# Altium PCB STM32C011F6U.PcbDoc
Units mil, origin at the board's own origin, x right, y up, seen from the top; angles counter-clockwise.
Board outline 3543.31 x 1377.95 mil, 2 copper layers (Top Layer, Bottom Layer); 14 components, 19 nets, 72 pads, 60 vias.
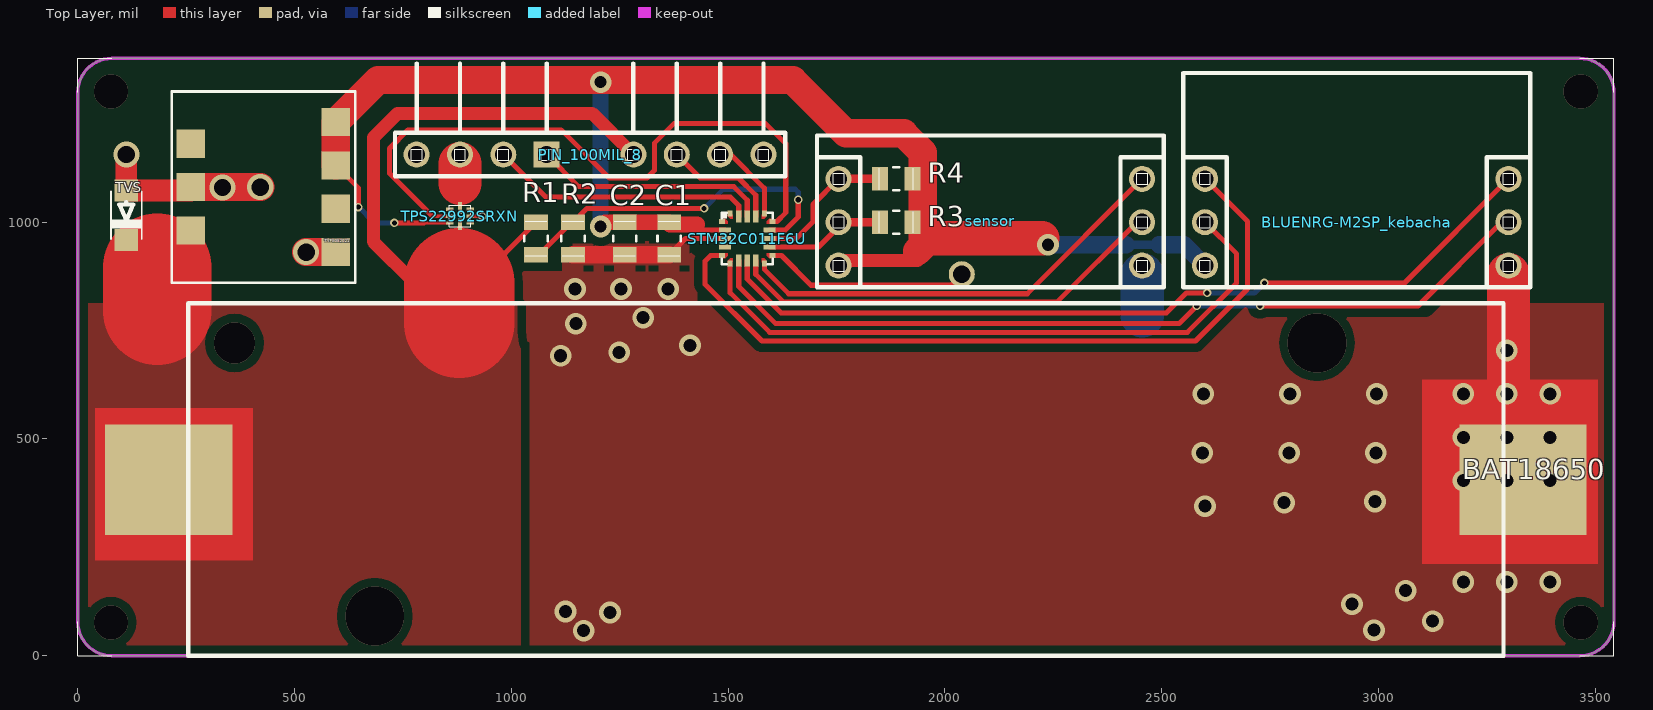
[diagram p0: Top Layer view]
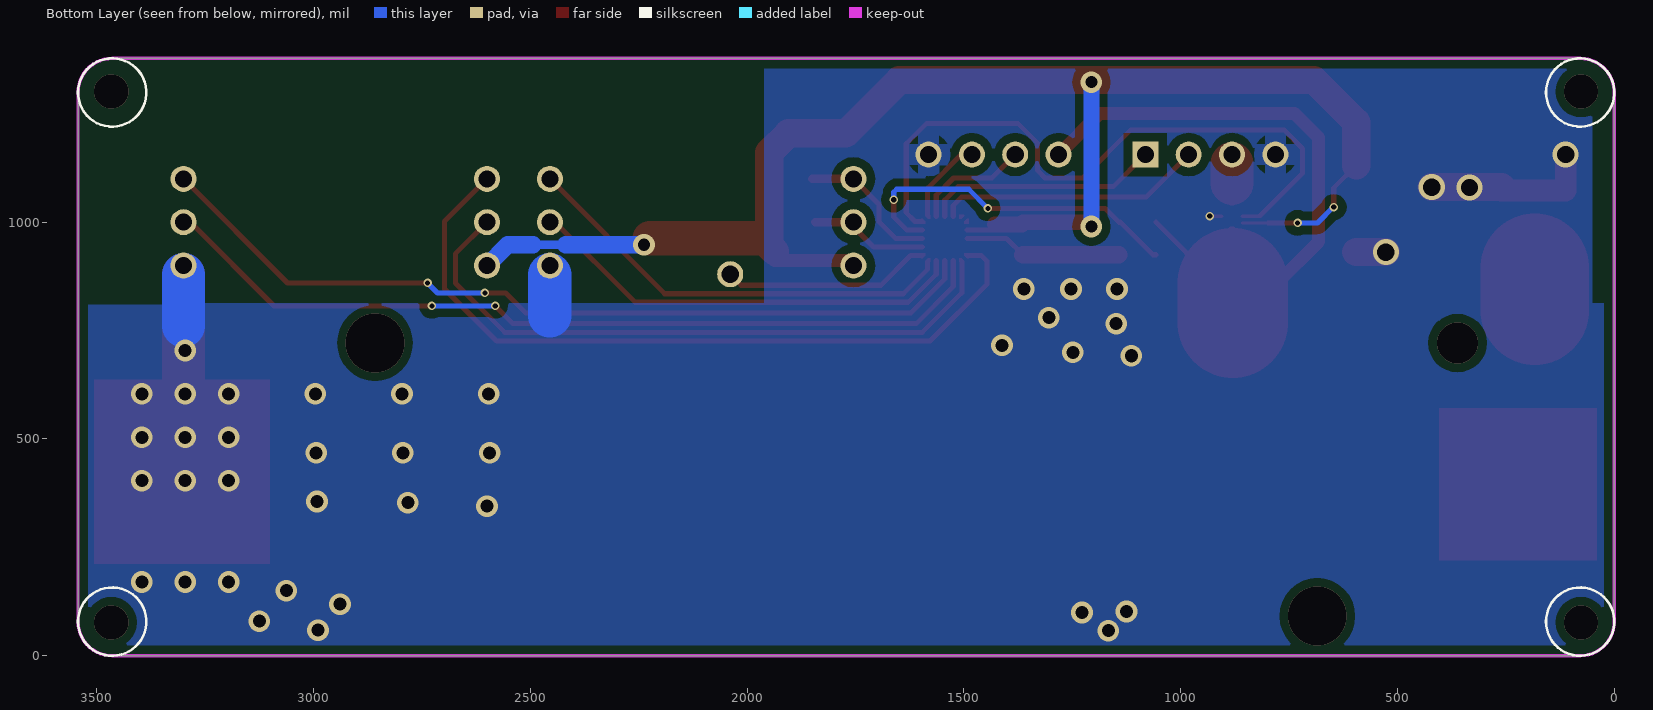
[diagram p1: Bottom Layer view, seen from below]

## Layer stack, top to bottom
Top Layer: signal copper 1.4
Dielectric: dielectric 12.6, FR-4, Dk 4.8
Bottom Layer: signal copper 1.4

## Board outline
0,78.74 0,1299.21 cw(c78.74,1299.21) 78.74,1377.95 3464.57,1377.95 cw(c3464.57,1299.21) 3543.31,1299.21 3543.31,78.74 cw(c3464.57,78.74) 3464.57,0 78.74,0 cw(c78.74,78.74)

## Design rules (kind name [scope] priority, off if disabled: settings)
Clearance Polygon [InPolygon] p1: gap=19.68
Clearance [All] p2: gap=7.87
PlaneConnect [All] p1: planeconnectstyle=Relief reliefexpansion=31.5 reliefentries=4 reliefconductorwidth=15 reliefairgap=3.94
PolygonConnect Via [isVIa] p1: connectstyle=Direct reliefconductorwidth=10 reliefentries=4 polygonreliefangle="90 Angle"
PolygonConnect [All] p2: connectstyle=Relief reliefconductorwidth=50 reliefentries=4 polygonreliefangle="90 Angle"
RoutingVias [All] p1: holewidth=28 width=50 viastyle="Through Hole" minholewidth=28 minwidth=50 maxholewidth=28 maxwidth=50
SilkscreenOverComponentPads [All] p1: minsilkscreentomaskgap=10
SolderMaskExpansion ispad [ispad] p1: expansion=0
SolderMaskExpansion [All] p2: expansion=0
Width [All] p1: maxlimit=600 minlimit=7.87 preferedwidth=10 bottomlayer_maxwidth=100 minimp=50.000000 maximp=50.000000 favimp=50.000000
26 further rules are at their usual default settings.

## Components (designator, comment, footprint, x,y, rotation, side; value= is the part's Value field where it differs from the comment)
BAT18650 "" Holder_for_18650 1771.65,406.5 r180 top locked
BLUENRG-M2SP_kebacha "" BLUENRG-M2SP_kebacha 2600,900 r0 top locked
C1 "0.1u" 0805 1364,962.42 r270 top
C2 "4.7u" 0805 1261.67,962.42 r270 top
PIN_100MIL_8 "" PIN_100MIL_8 781.65,1156 r0 top locked
R1 "900k" 0805 1057,962.42 r90 top
R2 "100k" 0805 1142.33,962.42 r90 top
R3 "2.1k" 0805 1888,1000 r0 top
R4 "2.1k" 0805 1888,1100 r0 top
sensor "" sensor_kabacha 1755,900 r0 top locked
STM32C011F6U "" UFQFPN20 1544.25,962.42 r0 top locked
TPS22992SRXN "" WQFN-HR 881.65,1014 r90 top locked
TVS "SMF5.0A" SMF 112,1016 r270 top
TYPS052021 "LDO" TYPS052018 428,1081 r180 top

## Footprints (in the part's own frame and the unit in brackets; to place one, negate y for a bottom-side part, rotate by r counter-clockwise, add the part's x,y. Pads: shape width x height; smd on the part's side, far side on the other; paste and mask are expansions set on the pad)
0805 [mm]
  rect 0.92x1.38 smd: 1(-0.955,0) 2(0.955,0)
  silkscreen extent -1,-0.68 1,0.68
BLUENRG-M2SP_kebacha [mil]
  round 60 hole 39.37: 1(0,0) 2(0,100) 3(0,200) 4(700,200) 5(700,100) 6(700,0)
  silkscreen extent -50,-50 750,444
Holder_for_18650 [mm]
  rect 7.46x6.47 smd: +(39.67,0) -(-39.67,0)
  silkscreen extent -38.53,-10.33 38.53,10.33
PIN_100MIL_8 [mil]
  round 60 hole 39.37: 1(0,0) 2(100,0) 3(200,0) 5(500,0) 6(600,0) 7(700,0) 8(800,0)
  rect 60x60 hole 39.37: 4(300,0)
  silkscreen extent -50,-50 850,210
sensor_kabacha [mil]
  round 60 hole 39.37: 1(0,0) 2(0,100) 3(0,200) 4(700,200) 5(700,100) 6(700,0)
  silkscreen extent -50,-50 750,300
SMF [mm]
  rect 1.3x1.4 smd: 1(-1.45,0) 2(1.45,0)
  silkscreen extent -1.4,-0.9 1.4,0.9
TYPS052018 [mil]
  rect 65x65 smd: 1(-167.32,150) 1(167.32,0) 2(167.32,100) 3(-167.32,-50) 3(-167.32,-150) NC(-167.32,50) NC(167.32,-100)
  silkscreen extent -212,-220 212,220
UFQFPN20 [mm]
  rect 0.35x0.3 smd paste+0 mask+0: 1(-1.475,1) 5(-1.475,-1) 11(1.475,-1) 15(1.475,1)
  rect 0.7x0.3 smd paste+0 mask+0: 2(-1.3,0.5) 3(-1.3,0) 4(-1.3,-0.5) 12(1.3,-0.5) 13(1.3,0) 14(1.3,0.5)
  rect 0.3x0.35 smd paste+0 mask+0: 6(-1,-1.475) 10(1,-1.475) 16(1,1.475) 20(-1,1.475)
  rect 0.3x0.7 smd paste+0 mask+0: 7(-0.5,-1.3) 8(0,-1.3) 9(0.5,-1.3) 17(0.5,1.3) 18(0,1.3) 19(-0.5,1.3)
  Top Layer region: 1,1.15 0.85,1.15 0.85,1.4 1.15,1.4 1.15,1.3
  Top Layer region: 1.15,-1 1.15,-0.85 1.4,-0.85 1.4,-1.15 1.3,-1.15
  Top Layer region: 1,-1.15 0.85,-1.15 0.85,-1.4 1.15,-1.4 1.15,-1.3
  Top Layer region: -1,-1.15 -0.85,-1.15 -0.85,-1.4 -1.15,-1.4 -1.15,-1.3
  Top Layer region: -1.15,-1 -1.15,-0.85 -1.4,-0.85 -1.4,-1.15 -1.3,-1.15
  Top Layer region: -1.15,1 -1.15,0.85 -1.4,0.85 -1.4,1.15 -1.3,1.15
  Top Layer region: -1,1.15 -0.85,1.15 -0.85,1.4 -1.15,1.4 -1.15,1.3
  Top Layer region: 1.15,1 1.15,0.85 1.4,0.85 1.4,1.15 1.3,1.15
  silkscreen extent -1.5,-1.5 1.5,1.5
WQFN-HR [mm]
  rect 0.2x0.45 smd mask+0.05: 1(-0.4,0.6) 3(-0.4,-0.6) 4(0,-0.6) 5(0.4,-0.6) 7(0.4,0.6) 8(0,0.6)
  rect 0.7x0.25 smd mask+0.05: 2(-0.475,0) 6(0.475,0)
  Top Layer region: -0.635,0.127 -1.016,0.381 -1.016,-0.381 -0.635,-0.127
  Top Layer region: 0.635,0.127 1.016,0.381 1.016,-0.381 0.635,-0.127
  silkscreen extent -0.63,-0.63 0.63,0.63

## Part data
BAT18650: library part BAT18650, "4.2 to 2.5V"
BLUENRG-M2SP_kebacha: library part BLUENRG-M2SP_kebacha
C1 C2: library part C
PIN_100MIL_8: library part PIN_100mil_
R1 R2 R3 R4: library part R
sensor: library part sensor
STM32C011F6U: library part STM32C011F6U
TPS22992SRXN: library part TPS22992SRXN
TVS: library part TVS

## Free pads (board coordinates)
  round 60 hole 40: 0(2039,880)

## Via types
v1: diameter 50, hole 30, Top Layer to Bottom Layer, 37 vias
v2: diameter 19.68, hole 11.81, Top Layer to Bottom Layer, 9 vias
v3: diameter 60, hole 40, Top Layer to Bottom Layer, 4 vias
v4: diameter 78.74, hole 78.74, Top Layer to Bottom Layer, 4 vias
v5: diameter 50, hole 28, Top Layer to Bottom Layer, 3 vias
v6: diameter 135.83, hole 135.83, Top Layer to Bottom Layer, 2 vias
v7: diameter 94.49, hole 94.49, Top Layer to Bottom Layer, 1 vias

## Nets (pads, with @x,y where several pads share a name; then routed paths per layer and width w, separated by ;. In a path a pad name is that pad's centre, name@x,y a point inside that pad or via, vN(x,y) a via of type N, cw(c..) or ccw(c..) an arc to the next point about the centre after c; other vN are vias at no path point)
2.5-4.2V: BAT18650.+ PIN_100MIL_8.5 R1.2 TPS22992SRXN.2 TVS.2 TYPS052021.2 | length 1565.4
  Top Layer w12: 778,859 880,859 915.98,859 R1.2
  Top Layer w30: 778,859 682,955 682,1195 738,1251 1186.65,1251 PIN_100MIL_8.5
  Top Layer w250: 183.84,796 183.84,895
  Top Layer w254.72: 880,768 880,859
AD11: R1.1 R2.2 STM32C011F6U.14 | length 807.7
  Top Layer w11.81: R2.2 1174.22,1031.91 v2(1444.84,1031.91) ; STM32C011F6U.14 1632.1,982.1 1662,1012 v2(1662,1051.75) v2@1662,1053
  Top Layer w12: R1.1 1063.82,924.82 1139.02,1000.02 R2.2
  Bottom Layer w11.81: v2(1444.84,1031.91) 1488.94,1076 1655,1076 1662,1069 v2(1662,1051.75)
GND: BAT18650.- BLUENRG-M2SP_kebacha.6 C1.2 C2.2 PIN_100MIL_8.1 PIN_100MIL_8.8 R2.1 sensor.6 STM32C011F6U.3 TPS22992SRXN.4 TVS.1 TYPS052021.1 | length 1506.3
  Top Layer w7.87: TPS22992SRXN.4 v2(933,1014)
  Top Layer w11.81: C1.2 1401.6,962.42 STM32C011F6U.3
  Top Layer w40: R2.1 C2.2 C1.2
  Top Layer w50: v3(112,1156) TVS.1 TYPS052021.1@260.68,1073.09
  Top Layer w65: TYPS052021.1@260.68,1081 v3(421,1081) ; v3(527,931) TYPS052021.1@595.32,931
  Top Layer w100: BAT18650.-@3300,439.96 BLUENRG-M2SP_kebacha.6@3300,879
  Bottom Layer w100: 2455,784.05 sensor.6@2455,879 ; 3300,761 BLUENRG-M2SP_kebacha.6@3300,879
  other v1: 1167,58 2989.67,59 3125,80 1227.67,100 1125,102 2939,119 3063,150 3196,170 3296,170 3396,170 2600,345 2782.64,353 2992,356 3196,404 3296,404 3396,404 2594,468 2794,468 2994,468 3196,504 3296,504 3396,504 2596,604 2796,604 2996,604 3196,604 3296,604 3396,604 1114,692 1249,700 3296,704 1412,716.07 1149,766 1304,780 1147,846 1253,846 1362,846
  other v3: 334,1080
P_OUTPUT: PIN_100MIL_8.2 TPS22992SRXN.6 | length 45
  Top Layer w100: 881.65,1090 PIN_100MIL_8.2@881.65,1135
PA0: BLUENRG-M2SP_kebacha.3 STM32C011F6U.5 | length 1747.1
  Top Layer w11.81: STM32C011F6U.5 1460.05,923.05 1447,910 1447,857 1578,726 2578,726 2698,846 2698,1002 BLUENRG-M2SP_kebacha.3
PA1: BLUENRG-M2SP_kebacha.2 STM32C011F6U.6 | length 1490.5
  Top Layer w11.81: STM32C011F6U.6 1504.88,837.12 1596,746 2559,746 2673,860 2673,927 BLUENRG-M2SP_kebacha.2
PA2: BLUENRG-M2SP_kebacha.5 STM32C011F6U.7 | length 1967.5
  Top Layer w11.81: STM32C011F6U.7 1524.57,851.43 1610,766 2540,766 v2(2581,807) ; v2(2727,807) 3091,807 3284,1000 BLUENRG-M2SP_kebacha.5
  Bottom Layer w11.81: v2(2581,807) v2(2727,807)
PA3: BLUENRG-M2SP_kebacha.4 STM32C011F6U.8 | length 1958.4
  Top Layer w11.81: STM32C011F6U.8 1544.25,868.75 1622,791 2511,791 2557,837 v2(2605,837) ; v2(2737,860) 3060,860 BLUENRG-M2SP_kebacha.4
  Bottom Layer w11.81: v2(2605,837) 2714,837 v2(2737,860)
PA4: sensor.5 STM32C011F6U.9 | length 1025.6
  Top Layer w11.81: STM32C011F6U.9 1563.94,880.06 1628.69,815.32 2258.31,815.32 2443,1000 sensor.5
PA5: sensor.4 STM32C011F6U.10 | length 1017.5
  Top Layer w11.81: STM32C011F6U.10 1583.62,891.38 1640,835 2190,835 sensor.4
PA6: pad.0 STM32C011F6U.11 | length 475.5
  Top Layer w11.81: STM32C011F6U.11 1623.13,923.05 1691.49,854.68 2013.69,854.68 pad.0
PA7: R3.1 sensor.2 STM32C011F6U.12 | length 267.1
  Top Layer w11.81: STM32C011F6U.12 1708.73,942.73 sensor.2@1755,989
  Top Layer w19.68: sensor.2 R3.1@1843.4,1000
PA8: R4.1 sensor.3 STM32C011F6U.13 | length 334.4
  Top Layer w11.81: STM32C011F6U.13 1657.42,962.42 1696,1001 1696,1041 sensor.3
  Top Layer w19.68: sensor.3 R4.1@1849.4,1100
PA12: STM32C011F6U.15 TPS22992SRXN.8 | length 1521.4
  Top Layer w7.87: 816.03,1015.97 818,1014 TPS22992SRXN.8
  Top Layer w11.81: 816.03,1015.97 719,1113 719,1170 762,1213 1115,1213 1226,1102 1313,1102 1330,1119 1330,1182 1376,1228 1586,1228 1633,1181 1633,1022 1612.79,1001.79 STM32C011F6U.15
PB6: PIN_100MIL_8.4 STM32C011F6U.18 | length 543.3
  Top Layer w11.81: PIN_100MIL_8.4 1155.65,1082 1513,1082 1544.25,1050.75 STM32C011F6U.18
PB7: PIN_100MIL_8.3 STM32C011F6U.19 | length 616.4
  Top Layer w11.81: PIN_100MIL_8.3 1079.65,1058 1505,1058 1524.57,1038.43 STM32C011F6U.19
SWCLK: PIN_100MIL_8.6 STM32C011F6U.17 | length 269.7
  Top Layer w11.81: PIN_100MIL_8.6 1435.97,1101.68 1524.31,1101.68 1563.94,1062.06 STM32C011F6U.17
SWDIO: PIN_100MIL_8.7 STM32C011F6U.16 | length 192
  Top Layer w11.81: PIN_100MIL_8.7 1506,1156 1583.62,1078.38 STM32C011F6U.16
VDD: BLUENRG-M2SP_kebacha.1 C1.1 C2.1 R3.2 R4.2 sensor.1 STM32C011F6U.2 TPS22992SRXN.1 TYPS052021.3 | length 3676.6
  Top Layer w7.87: 798,998.25 TPS22992SRXN.1
  Top Layer w11.81: TYPS052021.3@595.32,1131 647,1079.32 v2(647,1034.75) ; v2(730.57,998.25) 798,998.25 ; C1.1@1368.1,995.91 1369.1,994.91 1381.91,982.1 STM32C011F6U.2
  Top Layer w30: sensor.1 1767,912 1936.4,912 1936.4,933
  Top Layer w36.22: v5(1206,990) 1216.02,1000.02 C2.1 C1.1 ; C1.1@1366.1,994.91 1369.1,994.91 1429,994.91
  Top Layer w65: TYPS052021.3@595.32,1131 595.32,1231 692.32,1328 1649,1328 1772,1205 1905,1205 1949,1161 1949,945.6 1936.4,933
  Top Layer w80: 1967,963 v5@2225,963
  Bottom Layer w11.81: v2@647,1036 684.75,998.25 v2(730.57,998.25)
  Bottom Layer w20: 2418,948 2494,948
  Bottom Layer w36.22: v5(1206,990) v5(1206,1323)
  Bottom Layer w40: v5(2238,948) 2418,948 ; 2494,948 2552,948 BLUENRG-M2SP_kebacha.1
pads on no net: STM32C011F6U.1 STM32C011F6U.4 STM32C011F6U.20 TPS22992SRXN.3 TPS22992SRXN.5 TPS22992SRXN.7 TYPS052021.NC
copper on no net:
  other v4: 76.77,76.77 3466.54,76.77 76.77,1301.18 3466.54,1301.18
  other v6: 685.04,91.54 2858.27,721.46
  other v7: 361.42,721.46

## Polygon pours and split planes (outlines as drawn)
GND on Bottom Layer "GND_buttom2" (solid, remove dead copper, pour order 9): 1941.76,786 1961,802 1961,1368 54.85,1368 32,1387 51.24,1371 51.24,770
GND on Bottom Layer "GND_buttom" (solid, pour order 6): 3543.31,0 3541,2.31 3541,810 3291.38,810 3288.39,812.99 254.92,812.99 0.01,812.99 -2,815 -2,2 0,0
2.5-4.2V on Top Layer "GND_top3" (solid, pour order 8): 1022,0 1022,812.99 16.06,812.99 0,796.94 0,0
GND on Top Layer "GND_top2" (solid, pour order 10): 1010,956 1389,956 1413,932 1429,916 1429,756 1077.93,756 1038,716.07
GND on Top Layer "GND_top" (solid, pour order 7): 3541,806 3534.01,812.99 3288.39,812.99 1042.01,812.99 1038,817 1038,1 1036,-1 3542.31,-1 3543.31,0

## Keep-outs
Keep-Out Layer:
  the board outline again, w7.87

## Other copper
Top Layer:
  rectangle net 2.5-4.2V: 40,220 404,571
  rectangle net GND: 3101,212 3507,637
  pour cut-out: 2550,1384 3537.26,1384 3543.31,1377.95 3543.31,1149.69 3544,1149 3351,1149 3350,1150 2550,1150

## Silkscreen, mask and mechanical layers (free items; w line width, h text height)
Top Overlay:
  lines w0.39: 0,78.74 0,0 78.74,0 ; 0,1299.21 0,1377.95 78.74,1377.95 ; 3464.57,0 3543.31,0 3543.31,78.74 ; 3464.57,1377.95 3543.31,1377.95 3543.31,1299.21
Bottom Overlay:
  circle w5.91: c3464.57,1299.21 r78.74
  circle w5.91: c78.74,1299.21 r78.74
  circle w5.91: c78.74,78.74 r78.74
  circle w5.91: c3464.57,78.74 r78.74